# Altium PCB PCB1.PcbDoc
Units mm, origin at the board's own origin, x right, y up, seen from the top; angles counter-clockwise.
Board outline 80.35 x 60.25 mm, 2 copper layers (Top Layer, Bottom Layer); 48 components, 37 nets, 170 pads, 23 vias.
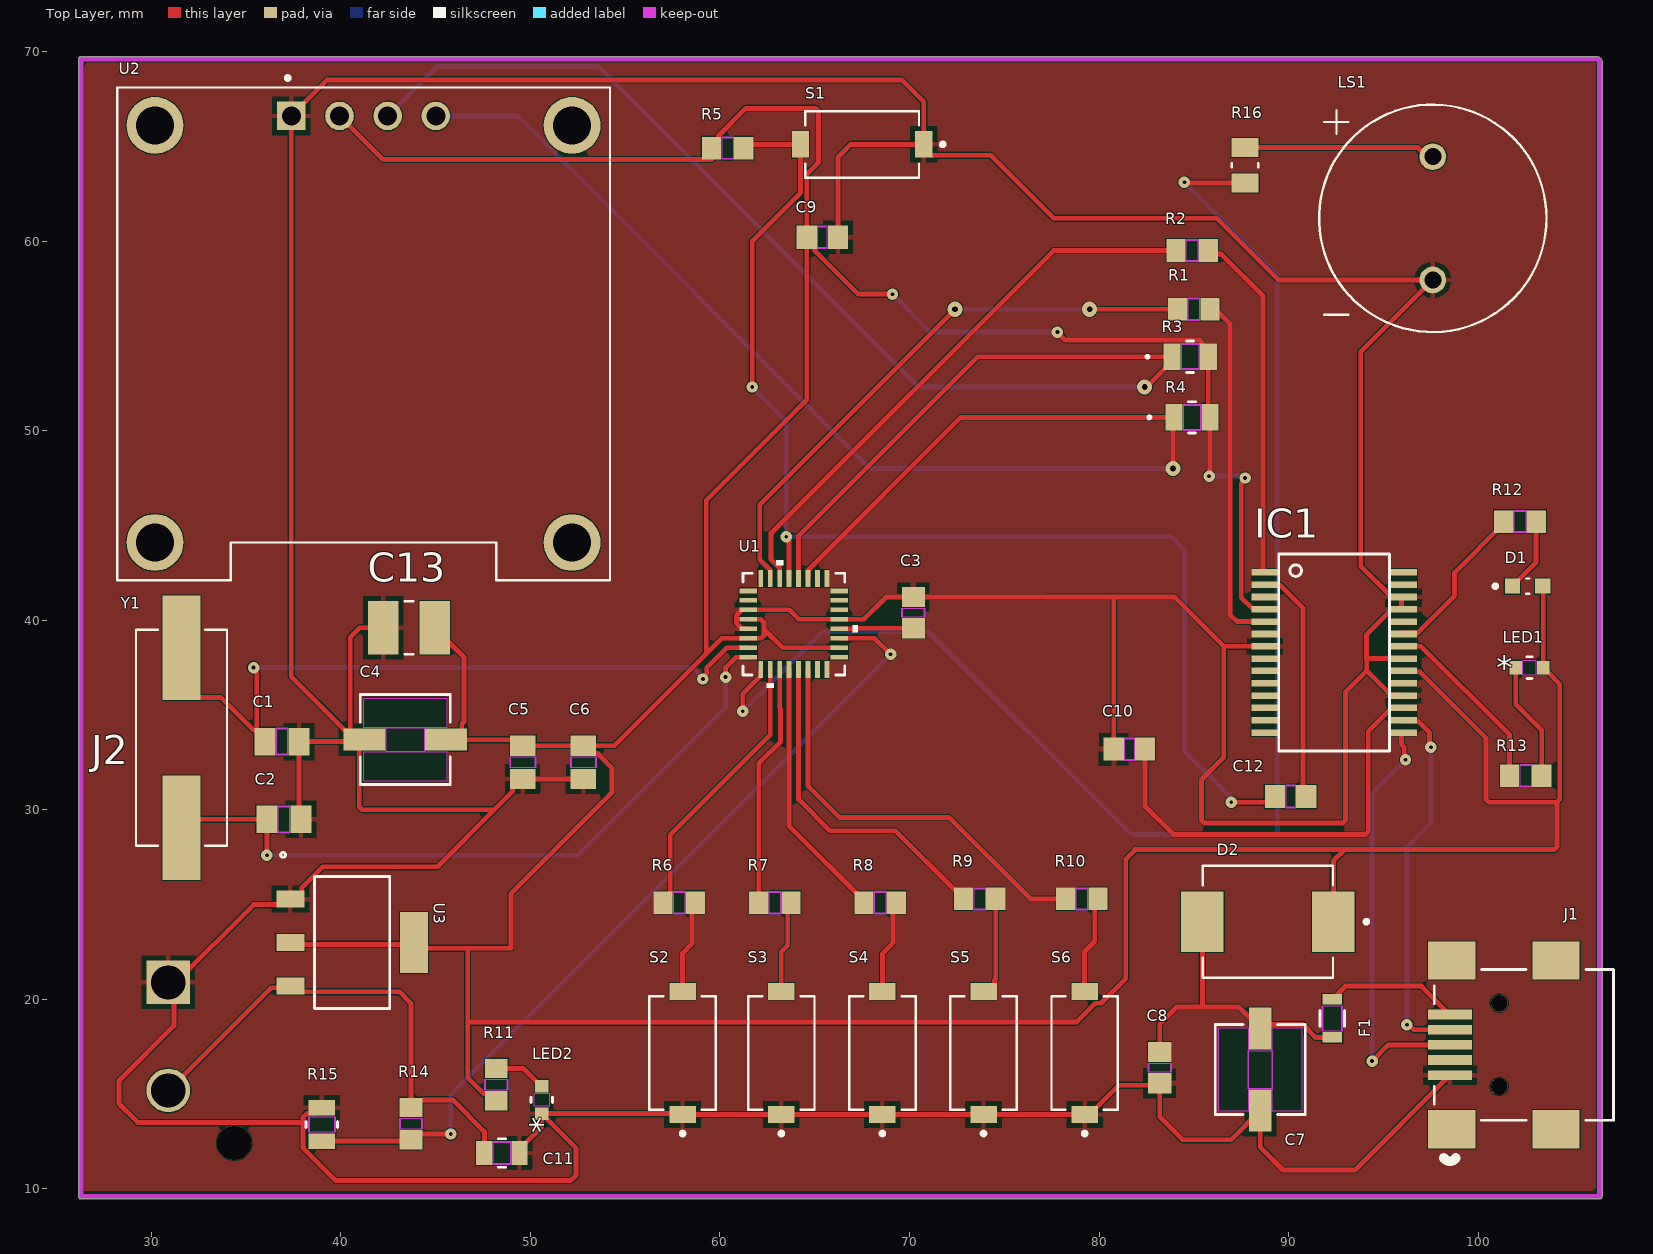
[diagram p0: Top Layer view]
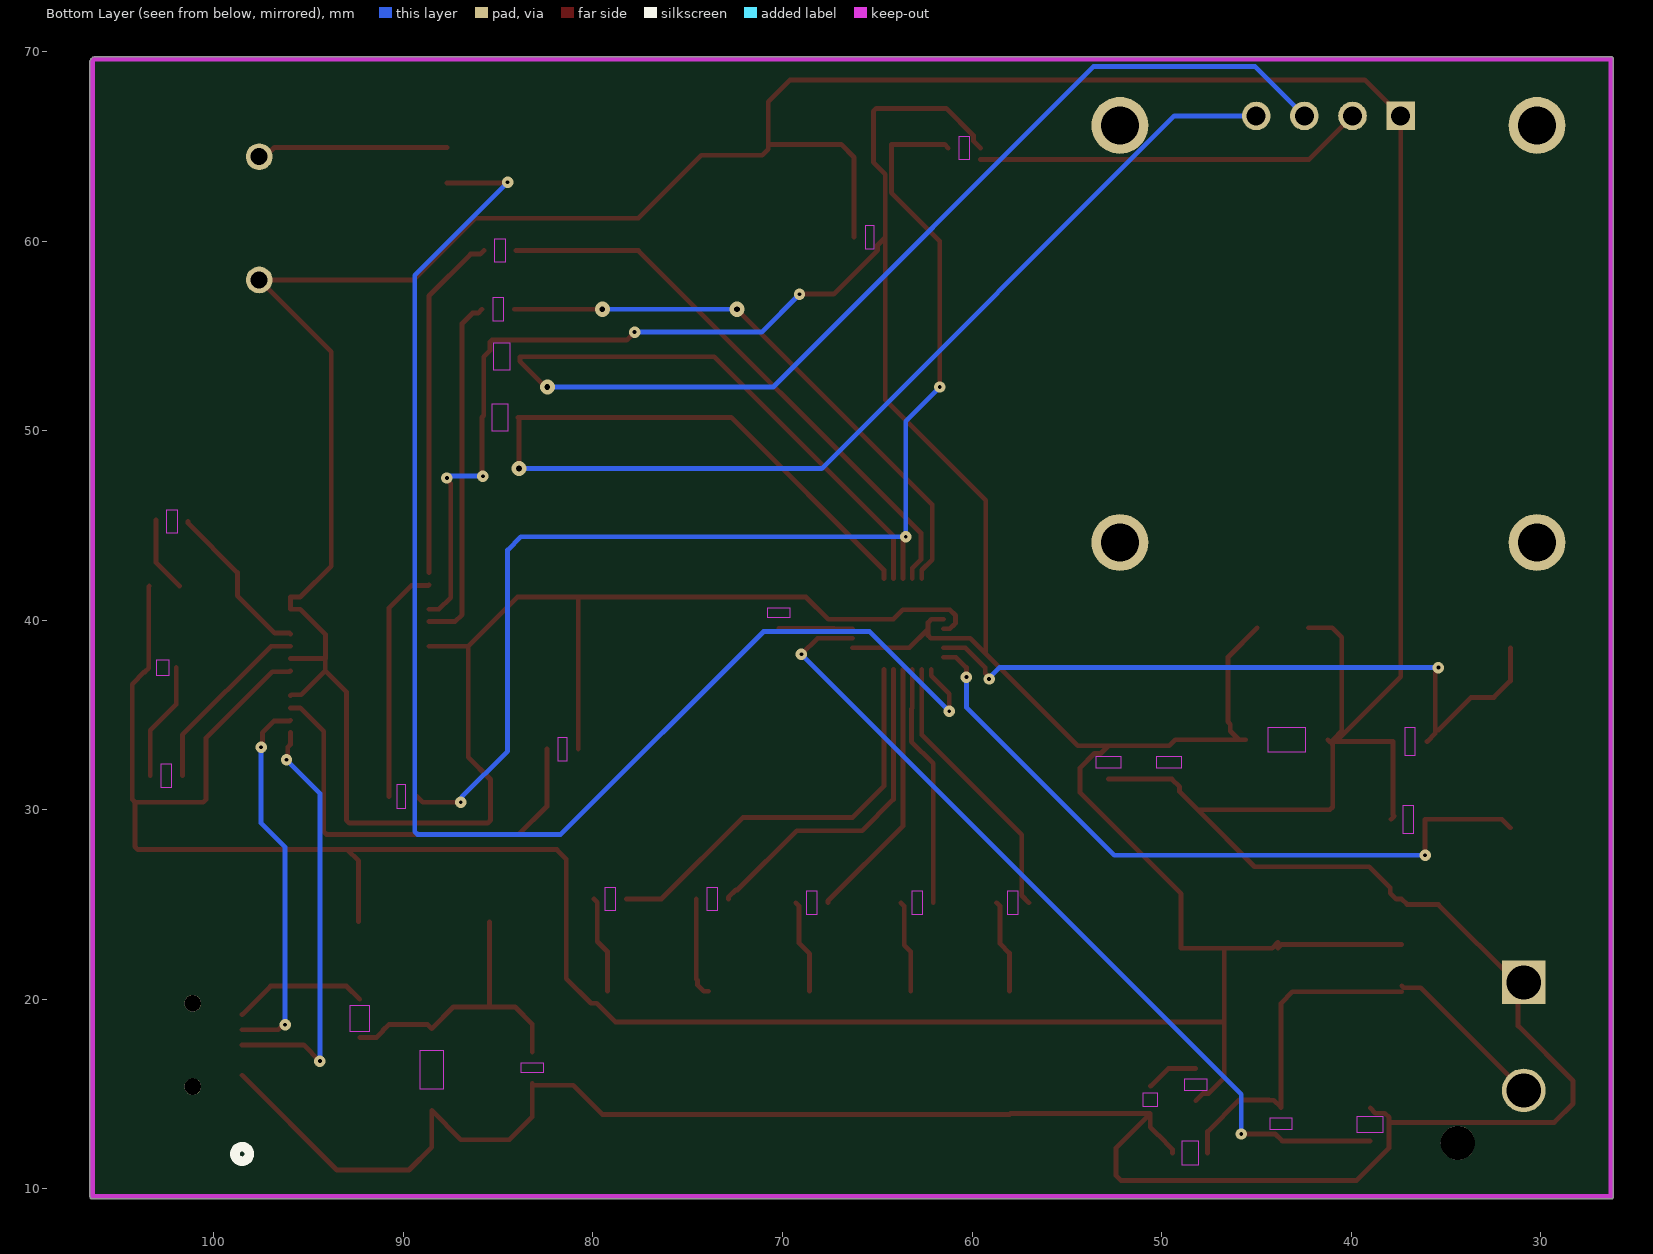
[diagram p1: Bottom Layer view, seen from below]
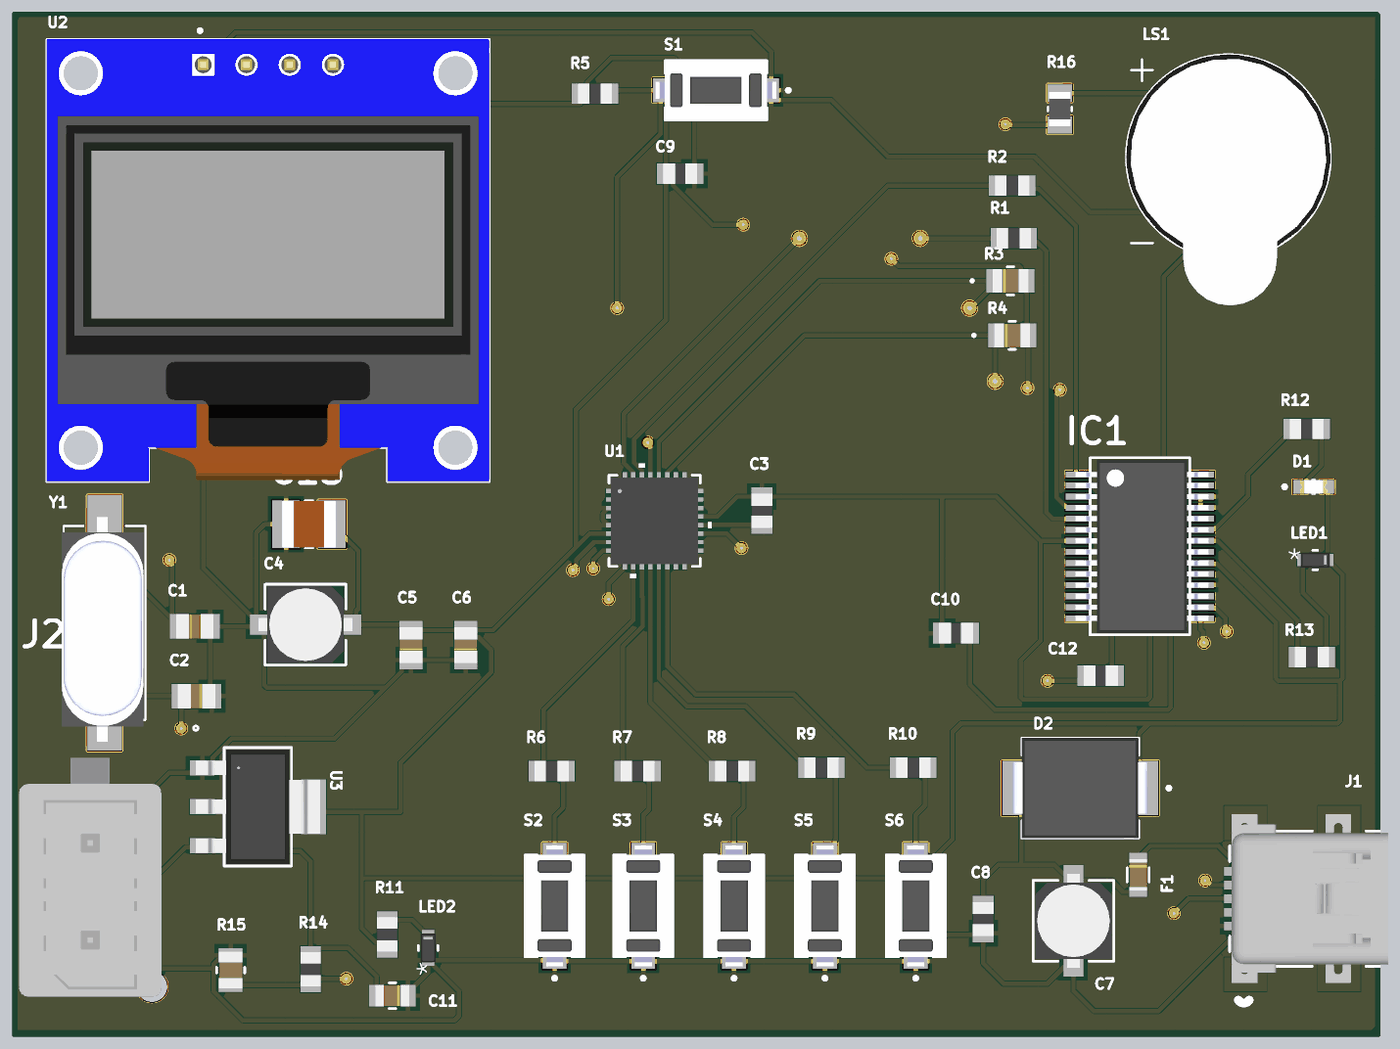
[diagram p2: 3D render of the assembled board from above, using the file's embedded part models]

## Layer stack, top to bottom
Top Solder: solder mask 0.0102, Solder Resist, Dk 3.5
Top Layer: signal copper 0.0356
Dielectric 1: dielectric 0.32, FR-4, Dk 4.8
Bottom Layer: signal copper 0.0356
Bottom Solder: solder mask 0.0102, Solder Resist, Dk 3.5

## Board outline
26.173,9.6 ccw(c26.3,9.6) 26.3,9.473 106.4,9.473 ccw(c106.4,9.6) 106.527,9.6 106.527,69.5 106.49,69.59 106.39,69.69 106.3,69.727 26.3,69.727 ccw(c26.3,69.6) 26.173,69.6

## Design rules (kind name [scope] priority, off if disabled: settings)
Clearance [All] p1: gap=0.05 ignorepadtopadclearanceinfootprint=FALSE
PolygonConnect [All] p1: connectstyle=Relief reliefconductorwidth=0.254 reliefentries=4 polygonreliefangle="90 Angle" airgapwidth=0.254
RoutingVias [All] p1: holewidth=0.711 width=1.27 viastyle="Through Hole" minholewidth=0.711 minwidth=1.27 maxholewidth=0.711 maxwidth=1.27
SolderMaskExpansion [All] p1: expansion=0.102 istentingtop=FALSE
Width [All] p1: maxlimit=0.254 minlimit=0.254 preferedwidth=0.254
30 further rules are at their usual default settings.

## Components (designator, comment, footprint, x,y, rotation, side; value= is the part's Value field where it differs from the comment)
C1 "CAP_18pfar_805pkg" CAP_CC0805_YAG 36.897,33.6 r0 top
C2 "CAP_18pfar_805pkg" CAP_CC0805_YAG 37,29.5 r180 top
C3 "100nF" CC0805N_YAG 70.2,40.4 r270 top
C4 "4.7uF" CAP_PAN_EEE_B_PAN 43.4,33.7 r180 top
C5 "1uF" CAP_CL21B105KAFNNNE_SAM 49.6,32.5 r90 top
C6 "1uF" CAP_CL21B105KAFNNNE_SAM 52.8,32.5 r90 top
C7 "3.7uF" CAP_PAN_EEE_B_PAN 88.5,16.3 r270 top
C8 "100nF" CC0805N_YAG 83.2,16.4 r90 top
C9 "100nF" CC0805N_YAG 65.4,60.2 r180 top
C10 "100nF" CC0805N_YAG 81.6,33.2 r0 top
C11 "10uF" CAP_CL21_SAM 48.5,11.9 r180 top
C12 "100nF" CC0805N_YAG 90.1,30.7 r0 top
C13 "22uF" CAPC3225X280N 43.6,39.6 r0 top
D1 "Red" LED_150060RS75000 102.6,41.8 r0 top
D2 "SS34" DIOM7959X265N 88.9,24.1 r180 top
F1 "MF-FSMF050X-2" FUSE_MF-FSMF050X_BRN 92.3,19 r270 top
IC1 "FT232RL-TUBE" SSOP28-LD 92.4,38.3 r270 top
J1 "1734327-2" CONN_1734327-2_TEC 102.4,17.6 r90 top
J2 "768290102" MOLEX_768290102 30.9,20.9 r180 top
LED1 "Green" LED_150060GS75000_WRE 102.7,37.5 r0 top
LED2 "Green" LED_150060GS75000_WRE 50.6,14.7 r90 top
LS1 "AT-1224-TWT-5V-2-R" XDCR_AT-1224-TWT-5V-2-R 97.6,61.2 r0 top
R1 "1K" RC0805N_YAG 85,56.4 r180 top
R2 "1K" RC0805N_YAG 84.9,59.5 r180 top
R3 "4.7K" RES_CRCW_0805_VIS 84.8,53.9 r0 top
R4 "4.7K" RES_CRCW_0805_VIS 84.9,50.7 r0 top
R5 "1K" RC0805N_YAG 60.4,64.9 r0 top
R6 "1K" RC0805N_YAG 57.851,25.1 r0 top
R7 "1K" RC0805N_YAG 62.9,25.1 r0 top
R8 "1K" RC0805N_YAG 68.451,25.1 r0 top
R9 "1K" RC0805N_YAG 73.7,25.3 r0 top
R10 "1K" RC0805N_YAG 79.092,25.3 r0 top
R11 "1K" RC0805N_YAG 48.2,15.5 r270 top
R12 "1K" RC0805N_YAG 102.2,45.2 r180 top
R13 "1K" RC0805N_YAG 102.5,31.8 r180 top
R14 "1K" RC0805N_YAG 43.7,13.449 r270 top
R15 "3K" RES_CRG0805_TEC 39,13.4 r270 top
R16 "220" RESC2012X65N 87.7,64 r270 top
S1 "PTS636_SM43J_SMTR_LFS" SW_PTS636_SM43J_SMTR_LFS 67.5,65.1 r180 top
S2 "PTS636_SM43J_SMTR_LFS" SW_PTS636_SM43J_SMTR_LFS 58.028,17.175 r90 top
S3 "PTS636_SM43J_SMTR_LFS" SW_PTS636_SM43J_SMTR_LFS 63.235,17.175 r90 top
S4 "PTS636_SM43J_SMTR_LFS" SW_PTS636_SM43J_SMTR_LFS 68.569,17.175 r90 top
S5 "PTS636_SM43J_SMTR_LFS" SW_PTS636_SM43J_SMTR_LFS 73.903,17.175 r90 top
S6 "PTS636_SM43J_SMTR_LFS" SW_PTS636_SM43J_SMTR_LFS 79.237,17.175 r90 top
U1 "ATMEGA328P-MUR" 32M1-A_ATM 63.9,39.8 r0 top
U2 "DM-OLED096-636" MODULE_DM-OLED096-636 41.2,55.1 r0 top
U3 "AMS1117-5.0" SOT_AMS1117-2.5_AMS 40.6,23 r270 top
Y1 "ECS-160-20-5PX-TR" XTAL_ECS-160-20-5PX-TR 31.6,33.8 r90 top

## Footprints (in the part's own frame and the unit in brackets; to place one, negate y for a bottom-side part, rotate by r counter-clockwise, add the part's x,y. Pads: shape width x height; smd on the part's side, far side on the other; paste and mask are expansions set on the pad)
32M1-A_ATM [mil]
  rect 36x10 smd paste+0 mask+0: 1(-94.5,68.9) 2(-94.5,49.21) 3(-94.5,29.53) 4(-94.5,9.84) 5(-94.5,-9.84) 6(-94.5,-29.53) 7(-94.5,-49.21) 8(-94.5,-68.9) 17(94.5,-68.9) 18(94.5,-49.21) 19(94.5,-29.53) 20(94.5,-9.84) 21(94.5,9.84) 22(94.5,29.53) 23(94.5,49.21) 24(94.5,68.9)
  rect 10x36 smd paste+0 mask+0: 9(-68.9,-94.5) 10(-49.21,-94.5) 11(-29.53,-94.5) 12(-9.84,-94.5) 13(9.84,-94.5) 14(29.53,-94.5) 15(49.21,-94.5) 16(68.9,-94.5) 25(68.9,94.5) 26(49.21,94.5) 27(29.53,94.5) 28(9.84,94.5) 29(-9.84,94.5) 30(-29.53,94.5) 31(-49.21,94.5) 32(-68.9,94.5)
  silkscreen extent -106,-132 132,132, body extent -101,-101 101,101, height 65
CAP_CC0805_YAG [mil]
  rect 44x57 smd paste+0 mask+0: 1(-35.31,0) 2(35.31,0)
  Top Layer keep-out region: -11.31,-26.5 -11.31,26.5 11.31,26.5 11.31,-26.5
  Keep-Out Layer region: -11.31,-28.5 -11.31,28.5 11.31,28.5 11.31,-28.5
  body extent -43,-29 43,29, height 57
CAP_CL21_SAM [mm]
  rect 0.856x1.25 smd paste+0 mask+0: 1(-0.928,0) 2(0.928,0)
  Top Layer keep-out region: -0.449,-0.574 -0.449,0.574 0.449,0.574 0.449,-0.574
  Keep-Out Layer region: -0.449,-0.625 -0.449,0.625 0.449,0.625 0.449,-0.625
  silkscreen extent -0.19,-0.75 0.19,0.75, body extent -1,-0.63 1,0.63, height 1.35
CAP_CL21B105KAFNNNE_SAM [mil]
  rect 42x53 smd paste+0 mask+0: 1(-34.5,0) 2(34.5,0)
  Top Layer keep-out region: -11.5,-24.5 -11.5,24.5 11.5,24.5 11.5,-24.5
  Keep-Out Layer region: -11.5,-26.5 -11.5,26.5 11.5,26.5 11.5,-26.5
  body extent -41,-26 41,26, height 53
CAP_PAN_EEE_B_PAN [mil]
  rect 87x46 smd paste+0 mask+0: 1(-85,0) 2(85,0)
  Top Layer keep-out region: -39.5,-25 -39.5,25 39.5,25 39.5,-25
  Top Layer keep-out region: -86.5,25 -86.5,86.5 86.5,86.5 86.5,25
  Top Layer keep-out region: -86.5,-86.5 -86.5,-25 86.5,-25 86.5,-86.5
  Keep-Out Layer region: -39.5,-25 -39.5,25 39.5,25 39.5,-25
  silkscreen extent -94,-94 94,94, body extent -109,-89 109,89, height 242
CAPC3225X280N [mm]
  rect 1.6x2.81 smd: 1(-1.353,0) 2(1.353,0)
  silkscreen extent -0.23,-1.4 0.23,1.4, body extent -1.6,-1.4 1.6,1.4, height 2.47
CC0805N_YAG [mil]
  rect 42x48 smd paste+0 mask+0: 1(-32.5,0) 2(32.5,0)
  Top Layer keep-out region: -9.5,-22 -9.5,22 9.5,22 9.5,-22
  Keep-Out Layer region: -9.5,-24 -9.5,24 9.5,24 9.5,-24
  body extent -39,-24 39,24, height 28
CONN_1734327-2_TEC [mil]
  rect 20x91 smd paste+0 mask+0: 1(-62.99,153.44) 2(-31.5,153.44) 3(0,153.44) 4(31.5,153.44) 5(62.99,153.44)
  rect 79x98 smd paste-49 mask-49: 6(-175.2,149.5) 7(175.2,149.5) 8(-175.2,-67.03) 9(175.2,-67.03)
  round 35 / inner round 60 / far side round 35 hole 35 unplated paste-99999 mask-17.5: 10(-86.61,51.08) 11(86.61,51.08)
  silkscreen extent -241,-186 156,186, body extent -195,-181 195,181, height 162
DIOM7959X265N [mm]
  rect 2.25x3.18 smd: A(3.455,0) C(-3.455,0)
  silkscreen extent -5.3,-2.95 3.44,2.95, body extent -3.98,-2.95 3.98,2.95, height 2.65
FUSE_MF-FSMF050X_BRN [mil]
  rect 22x41 smd paste+0 mask+0: 1(-39.5,0) 2(39.5,0)
  Top Layer keep-out region: -26.5,-18.5 -26.5,18.5 26.5,18.5 26.5,-18.5
  Keep-Out Layer region: -26.5,-20.5 -26.5,20.5 26.5,20.5 26.5,-20.5
  silkscreen extent -16,-26 16,26, body extent -36,-21 36,21, height 39
LED_150060GS75000_WRE [mil]
  rect 26x28 smd paste+0 mask+0: 1(-28.5,0) 2(28.5,0)
  Top Layer keep-out region: -13.5,-15.5 -13.5,15.5 13.5,15.5 13.5,-15.5
  Keep-Out Layer region: -13.5,-15.5 -13.5,15.5 13.5,15.5 13.5,-15.5
  silkscreen extent -6,-22 6,22, body extent -34,-17 34,17, height 32
LED_150060RS75000 [mm]
  rect 0.8x0.8 smd: 1(-0.8,0) 2(0.8,0)
  silkscreen extent -1.8,-0.4 0.08,0.4, body extent -0.8,-0.4 0.8,0.4, height 0.7
MODULE_DM-OLED096-636 [mm]
  rect 1.508x1.508 / inner round 1.508 / far side rect 1.508x1.508 hole 1: 1(-3.81,11.5)
  round 1.508 hole 1: 2(-1.27,11.5) 3(1.27,11.5) 4(3.81,11.5)
  round 3 hole 2: S1(-11,11) S2(11,11) S3(11,-11) S4(-11,-11)
  silkscreen extent -13,-13 13,13.6, body extent -13,-13 13,13, height 5.66
MOLEX_768290102 [mm]
  rect 2.3x2.3 / inner round 2.3 / far side rect 2.3x2.3 hole 1.8 mask+0.076: 1(0,0)
  round 2.3 hole 1.8 mask+0.076: 2(0,5.7)
  round 1.8 hole 1.8 unplated mask+0.076: ""(-3.48,8.47)
  body extent -4.03,-4.99 4.32,9.05, height 14.81
RC0805N_YAG [mil]
  rect 40x47 smd paste+0 mask+0: 1(-33.5,0) 2(33.5,0)
  Top Layer keep-out region: -11.5,-21.5 -11.5,21.5 11.5,21.5 11.5,-21.5
  Keep-Out Layer region: -11.5,-23.5 -11.5,23.5 11.5,23.5 11.5,-23.5
  body extent -39,-24 39,24, height 28
RES_CRCW_0805_VIS [mil]
  rect 36x55 smd paste+0 mask+0: 1(-37.5,0) 2(37.5,0)
  Top Layer keep-out region: -17.5,-25.5 -17.5,25.5 17.5,25.5 17.5,-25.5
  Keep-Out Layer region: -17.5,-27.5 -17.5,27.5 17.5,27.5 17.5,-27.5
  silkscreen extent -91,-32 7,32, body extent -41,-27 41,27, height 24
RES_CRG0805_TEC [mil]
  rect 32x55 smd paste+0 mask+0: 1(-34.5,0) 2(34.5,0)
  Top Layer keep-out region: -16.5,-25.5 -16.5,25.5 16.5,25.5 16.5,-25.5
  Keep-Out Layer region: -16.5,-27.5 -16.5,27.5 16.5,27.5 16.5,-27.5
  silkscreen extent -6,-32 6,32, body extent -43,-27 43,27, height 26
RESC2012X65N [mm]
  rect 1x1.42 smd: 1(-0.935,0) 2(0.935,0)
  silkscreen extent -0.12,-0.7 0.12,0.7, body extent -1,-0.63 1,0.63, height 0.66
SOT_AMS1117-2.5_AMS [mil]
  rect 35x58 smd paste+0 mask+0: 1(-90.16,-128.5) 2(0,-128.5) 3(90.16,-128.5)
  rect 126x58 smd paste+0 mask+0: 4(0,128.5)
  silkscreen extent -187,-148 137,78, body extent -132,-144 132,144, height 71
SSOP28-LD [mm]
  rect 0.348x1.397 smd: 1(-4.225,-3.656) 2(-3.575,-3.656) 3(-2.925,-3.656) 4(-2.275,-3.656) 5(-1.625,-3.656) 6(-0.975,-3.656) 7(-0.325,-3.656) 8(0.325,-3.656) 9(0.975,-3.656) 10(1.625,-3.656) 11(2.275,-3.656) 12(2.925,-3.656) 13(3.575,-3.656) 14(4.225,-3.656) 15(4.225,3.656) 16(3.575,3.656) 17(2.925,3.656) 18(2.275,3.656) 19(1.625,3.656) 20(0.975,3.656) 21(0.325,3.656) 22(-0.325,3.656) 23(-0.975,3.656) 24(-1.625,3.656) 25(-2.275,3.656) 26(-2.925,3.656) 27(-3.575,3.656) 28(-4.225,3.656)
  silkscreen extent -5.2,-2.93 5.2,2.93, body extent -5.1,-3.77 5.1,4.03, height 2
SW_PTS636_SM43J_SMTR_LFS [mm]
  rect 0.9x1.4 smd: 1(-3.25,0) 2(3.25,0)
  silkscreen extent -4.35,-1.75 3,1.75, body extent -3.55,-1.75 3.55,1.75, height 4.31
XDCR_AT-1224-TWT-5V-2-R [mm]
  round 1.408 hole 0.9: N(0,-3.25) P(0,3.25)
  silkscreen extent -6,-6 6,6, body extent -6,-8.73 6,6.01, height 9.06
XTAL_ECS-160-20-5PX-TR [mm]
  rect 5.5x2 smd: 1(-4.75,0) 2(4.75,0)
  silkscreen extent -5.7,-2.4 5.7,2.4, body extent -6.98,-2.28 6.22,2.52, height 4.31

## Part data
C1 C2: "No Description Available", Mfr_Name=Yageo
C3 C8 C9 C10 C12: library part CC0805KRX7R9BB104, "No Description Available", Mfr_Name=Yageo
C4 C7: library part EEE-HA1E4R7R, "No Description Available", Mfr_Name=Panasonic
C5 C6: library part CL21B105KAFNNNE, "No Description Available", Mfr_Name=Samsung
C11: library part CAP_10ufar_805pkg, "No Description Available", Mfr_Name=Samsung
C13: library part GCJ32ER71C226KE01L, "SMD Capacitor X7R_EIA_ with Capacitance: 22uF Tol. 10%. Rated Voltage: 16Vdc", Package="3225 Murata", Availability=Unavailable, MF=Murata, MP=GCJ32ER71C226KE01L, Price=None, SnapEDA_Link=https://www.snapeda.com/parts/GCJ32ER71C226KE01L/Murata/view-part/4383175/?ref=snap
D1: library part 150060RS75000, Package=None, Availability=Unavailable, MP=150060RS75000, Price=None
D2: "Diode Schottky 40 V 3A Surface Mount SMC (DO-214AB)", Package="SMC-2 ON Semiconductor", Check_prices=https://www.snapeda.com/parts/SS34/Onsemi/view-part/?ref=eda, MF=onsemi, MP=SS34, SnapEDA_Link=https://www.snapeda.com/parts/SS34/Onsemi/view-part/?ref=snap
F1: "No Description Available", Mfr_Name="Bourns Electronics"
IC1: "USB Bridge, USB to UART USB 2.0 UART Interface 28-SSOP", Package="SSOP-28 FTDI", Check_prices=https://www.snapeda.com/parts/FT232RL-TUBE/FTDI%252C+Future+Technology+Devices+International+Ltd/view-part/?ref=eda, Digi-Key_Part_Number=768-1306-ND, MF=FTDI,, MP=FT232RL-TUBE, Purchase-URL=https://pricing.snapeda.com/search/part/FT232RL-TUBE/?ref=eda, SnapEDA_Link=https://www.snapeda.com/parts/FT232RL-TUBE/FTDI%252C+Future+Technology+Devices+International+Ltd/view-part/?ref=snap
J1: "No Description Available", Mfr_Name="TE Connectivity", RefDes=RefDes, Type="USB, DVI, HDMI, Connectors"
J2: Package=None, Availability=Unavailable, MP=768290102, Price=None
LED1 LED2: library part 150060GS75000, "No Description Available", Mfr_Name="Wurth Electronics"
LS1: "AUDIO TRANSDUCER 12 VP-P 85 DB 2400 HZ", Package=None, Availability=Unavailable, MP=AT-1224-TWT-5V-2-R, Price=None
R1 R2 R5 R6 R7 R8 R9 R10 R11 R12 R13 R14: library part RC0805FR-071KL, "No Description Available", Mfr_Name=Yageo
R3 R4: library part CRCW08054K70FKEAC, "No Description Available", Mfr_Name=Vishay
R15: library part CRG0805F3K0, "No Description Available", Mfr_Name="TE Connectivity"
R16: library part CRGCQ0805F220R, "Fixed Resistor CRGCQ 0805 220R 1%", Package="2012 TE Connectivity", Digi-Key_Part_Number=A129741CT-ND, DigiKey-Purchase-URL=https://snapeda.com/shop?store=DigiKey&id=3188284, MF="TE Connectivity", Mouser-Purchase-URL=https://snapeda.com/shop?store=Mouser&id=3188284, MP=CRGCQ0805F220R, SnapEDA_Link=https://www.snapeda.com/parts/CRGCQ0805F220R/TE%20Connectivity%20Passive%20Product/view-part/3188284/?ref=snap
S1 S2 S3 S4 S5 S6: "Tactile Switch SPST-NO Top Actuated Surface Mount", Package=None, Availability=Unavailable, MP=PTS636_SM43J_SMTR_LFS, Price=None
U1: "No Description Available", Mfr_Name=Microchip, RefDes=RefDes, Type=Type
U2: "0.96â€ 128 X 64 MONOCHROME GRAPHIC OLED DISPLAY MODULE - I2C", Package=Package, Check_prices=https://www.snapeda.com/parts/DM-OLED096-636/Display+Module/view-part/?ref=eda, MF="Display Module", MP=DM-OLED096-636, SnapEDA_Link=https://www.snapeda.com/parts/DM-OLED096-636/Display+Module/view-part/?ref=snap
U3: "No Description Available", Mfr_Name="ams OSRAM", RefDes=RefDes, Type=Type
Y1: "16MHz Â±30ppm Crystal 20pF 40 Ohms HC-49/US", Package="HC49/US ECS International", Availability=Unavailable, MF="ECS Inc.", MP=ECS-160-20-5PX-TR, Price=None, SnapEDA_Link=https://www.snapeda.com/parts/ECS-160-20-5PX-TR/ECS%20Inc./view-part/554223/?ref=snap

## Via types
v1: diameter 0.6, hole 0.2, Top Layer to Bottom Layer, 19 vias
v2: diameter 0.8, hole 0.3, Top Layer to Bottom Layer, 4 vias

## Nets (pads, with @x,y where several pads share a name; then routed paths per layer and width w, separated by ;. In a path a pad name is that pad's centre, name@x,y a point inside that pad or via, vN(x,y) a via of type N, cw(c..) or ccw(c..) an arc to the next point about the centre after c; other vN are vias at no path point)
3.3: C10.2 IC1.17 | length 23
  Top Layer w0.254: C10.2 82.425,30.175 83.9,28.7 94.051,28.7 94.2,28.849 94.2,34.143 95.432,35.375 IC1.17@95.956,35.375
+5: C4.1 C5.2 C6.2 C9.2 C13.2 D1.2 D2.C IC1.4 IC1.20 LED1.2 R3.2 R4.2 R5.1 R11.2 U1.4 U1.6 U1.18 U2.2 U3.2 U3.4 | length 261.3
  Top Layer w0.254: U3.2@37.336,22.9 43.664,22.9 U3.4@43.864,22.7 ; U2.2 42.23,64.3 59.549,64.3 ; U3.4 44.164,22.7 46.7,22.7 ; C13.2 46.5,38.053 46.5,34.641 46.375,34.516 46.375,34.157 C4.1@45.918,33.7 ; C4.1 C4.1@45.918,33.7 ; R11.2 47.819,15.03 47.531,15.03 46.7,15.861 46.7,18.8 ; R5.1 59.93,65.281 59.93,65.569 61.361,67 65.051,67 65.2,66.851 65.2,64.154 64.575,63.529 C9.2 ; U1.4 62.146,40.05 62.32,39.876 62.32,39.537 ; U1.18 63.307,38.55 62.32,39.537 ; v1(69.1,57.2) 67.299,57.2 64.981,59.518 64.981,59.794 C9.2 ; v1(77.8,55.2) 78.224,54.775 85.318,54.775 85.422,54.671 85.422,54.23 R3.2 85.753,50.8 R4.2 85.853,47.652 v1(85.8,47.6) ; v1(87.7,47.5) 87.7,47.406 87.5,47.206 87.5,41.194 88.12,40.575 IC1.4@88.644,40.575 ; D2.C 92.355,27.305 92.95,27.9 ; IC1.20@95.956,37.325 95.998,37.283 96.917,37.283 100.4,33.8 100.4,30.549 100.549,30.4 104.151,30.4 ; D1.2 103.424,41.776 LED1.2 103.424,37.475 103.627,37.271 103.653,37.271 104.3,36.624 104.3,30.549 104.151,30.4 ; C4.1@45.918,33.7 49.276,33.7 C5.2 C6.2 ; 46.7,18.8 78.8,18.8 79.798,19.798 80.098,19.798 81.4,21.1 81.4,27.4 81.9,27.9 92.95,27.9 ; 46.7,18.8 46.7,22.7 ; 46.7,22.7 48.975,22.7 48.975,25.575 54.3,30.9 54.3,32.216 53.546,32.97 53.206,32.97 C6.2 ; C6.2 54.421,33.376 59.272,38.228 ; 59.272,38.228 60.095,39.05 U1.6 62.171,39.05 62.32,39.199 62.32,39.537 ; 59.272,38.228 59.272,46.321 64.575,51.624 C9.2 ; 92.95,27.9 104,27.9 104.151,28.051 104.151,30.4
  Bottom Layer w0.254: v1(69.1,57.2) 71.1,55.2 v1(77.8,55.2) ; v1(85.8,47.6) 87.6,47.6 v1(87.7,47.5)
AREF: C3.2 U1.20 | length 3.9
  Top Layer w0.254: U1.20 67.251,39.55 67.276,39.575 C3.2
BTN1: R6.1 U1.10 | length 14.6
  Top Layer w0.254: R6.1 57.381,25.481 57.381,28.685 62.65,33.954 U1.10
BTN2: R7.1 U1.11 | length 12.8
  Top Layer w0.254: R7.1 62.049,32.449 63.2,33.6 63.2,35.31 63.15,35.36 U1.11
BTN3: R8.1 U1.12 | length 13.9
  Top Layer w0.254: U1.12 63.65,29.139 67.6,25.189 R8.1
BTN4: R9.1 U1.13 | length 17.8
  Top Layer w0.254: U1.13 64.15,30.55 65.8,28.9 69.249,28.9 72.379,25.77 72.468,25.77 72.849,25.389 R9.1
BTN5: R10.1 U1.14 | length 22.2
  Top Layer w0.254: U1.14 64.65,31.25 66.3,29.6 72.08,29.6 76.38,25.3 R10.1
Buzzer: R16.2 U1.9 | length 76.5
  Top Layer w0.254: v1(61.2,35.2) 61.2,36.119 62.15,37.069 U1.9 ; v1(84.5,63.1) 84.535,63.065 R16.2
  Bottom Layer w0.254: v1(61.2,35.2) 65.4,39.4 71,39.4 81.7,28.7 89.251,28.7 89.4,28.849 89.4,58.2 v1(84.5,63.1)
DVBAT: R14.2 R15.2 U1.19 | length 44.9
  Top Layer w0.254: R15.2 43.626,12.524 R14.2 44.002,12.9 v1(45.8,12.9) ; U1.19 68.15,39.05 v1(69,38.2)
  Bottom Layer w0.254: v1(45.8,12.9) 45.8,15 v1(69,38.2)
GND: C1.2 C2.1 C3.1 C4.2 C5.1 C6.1 C7.2 C8.1 C9.1 C10.1 C11.1 C13.1 IC1.7 IC1.18 IC1.21 IC1.25 IC1.26 J1.1 J2.1 LED2.1 LS1.N R15.1 S1.1 S2.1 S3.1 S4.1 S5.1 S6.1 U1.3 U1.5 U1.21 U2.1 U3.1 | length 354.1
  Top Layer w0.254: C2.1 37.725,29.671 37.794,29.739 C1.2 C4.2@41.026,33.6 ; R15.1 38.721,13.997 38.281,13.997 38.228,13.996 38.005,13.773 38.005,13.5 ; C4.2 41.141,33.6 C4.2@41.026,33.6 ; C13.1 41,39.6 40.5,39.1 40.5,34.157 40.957,33.7 40.72,33.7 37.39,37.03 U2.1 39.29,68.5 69.6,68.5 70.75,67.35 S1.1 ; C11.1 49.428,12.097 50.162,12.831 50.167,12.831 50.6,13.265 LED2.1 ; C6.1 C5.1 49.46,31.624 49.054,31.217 49.054,30.954 48.1,30 ; U1.5 61.169,39.55 60.99,39.73 60.986,39.73 60.865,39.85 60.865,40.25 61.165,40.55 U1.3 63.65,40.55 64.15,40.05 U1.21 67.586,40.05 68.762,41.226 C3.1 77.166,41.226 ; C9.1 66.226,64.426 66.9,65.1 S1.1 ; 77.192,41.226 80.774,41.226 ; C10.1 80.774,41.226 ; C8.1@83.2,15.475 81.036,15.475 79.487,13.925 S6.1 S5.1 S4.1 S3.1 S2.1 57.977,13.976 LED2.1 ; C8.1 83.2,13.8 84.4,12.6 86.959,12.6 C7.2 88.5,12.2 89.7,11 93.503,11 J1.1 ; 83.975,41.226 80.774,41.226 ; 83.992,41.208 86.575,38.625 ; IC1.7@88.644,38.625 86.575,38.625 ; IC1.18@95.956,36.025 95.909,36.072 95.385,36.072 94.12,37.336 ; IC1.21@95.956,37.975 94.12,37.975 ; 38.005,13.5 38.005,12.163 39.719,10.45 52.15,10.45 52.4,10.7 52.4,12.176 LED2.1 ; 38.005,13.5 34.503,13.5 ccw(c34.38,12.43) 34.257,13.5 29.3,13.5 29.226,13.574 28.3,14.5 28.3,15.7 31.2,18.6 31.2,20.8 35.4,25 36.4,25 36.407,25.007 37.053,25.007 U3.1 37.625,25.29 37.942,25.608 37.942,25.896 39.046,27 45.1,27 48.1,30 ; C4.2@41.026,33.6 41.026,33.485 40.976,33.435 40.976,30.149 41.125,30 48.1,30 ; S1.1 70.75,64.85 71.073,64.527 74.273,64.527 77.6,61.2 86.2,61.2 89.45,57.95 LS1.N 93.805,54.155 93.805,42.851 95.432,41.225 95.956,41.225 95.956,40.575 95.432,40.575 94.1,39.243 94.1,37.975 94.12,37.975 ; 86.575,38.625 86.575,32.775 85.4,31.6 85.4,29.449 85.549,29.3 92.851,29.3 93,29.449 93,36.216 94.12,37.336 ; 94.12,37.336 94.12,37.975
NetC12_2: C12.2 IC1.2 | length 12.6
  Top Layer w0.254: IC1.2@88.644,41.875 88.691,41.828 89.572,41.828 90.751,40.649 C12.2@90.751,30.7
NetD1_1: D1.1 R12.1 | length 4
  Top Layer w0.254: D1.1 103.051,43.051 R12.1 R12.1@103.051,45.289
NetF1_1: F1.1 J1.5 | length 7.1
  Top Layer w0.254: F1.1 92.997,20.7 97.003,20.7 J1.5
NetIC1_15: IC1.15 J1.3 | length 22.6
  Top Layer w0.254: v1(94.4,16.745) 95.255,17.6 J1.3 ; IC1.15@95.956,34.075 95.956,33.445 96.097,33.305 96.097,32.703 v1(96.163,32.637)
  Bottom Layer w0.254: v1(94.4,16.745) 94.4,30.875 v1(96.163,32.637)
NetIC1_16: IC1.16 J1.4 | length 20.1
  Top Layer w0.254: IC1.16@95.956,34.725 96.003,34.678 96.822,34.678 97.434,34.066 97.434,33.366 v1(97.5,33.3) ; v1(96.234,18.666) 96.327,18.666 96.594,18.4 J1.4
  Bottom Layer w0.254: v1(96.234,18.666) 96.234,28.034 97.5,29.3 v1(97.5,33.3)
NetIC1_22: IC1.22 R13.2 | length 9.8
  Top Layer w0.254: IC1.22@95.956,38.625 96.975,38.625 101.649,33.951 R13.2
NetIC1_23: IC1.23 R12.2 | length 8.6
  Top Layer w0.254: IC1.23@95.956,39.275 96.003,39.322 96.783,39.322 98.748,41.286 98.748,42.51 101.349,45.111 R12.2
NetLED1_1: LED1.1 R13.1 | length 6.3
  Top Layer w0.254: LED1.1 101.976,35.56 103.351,34.185 R13.1
NetLED2_2: LED2.2 R11.1 | length 2.8
  Top Layer w0.254: R11.1 49.648,16.351 50.575,15.424 LED2.2
NetLS1_P: LS1.P R16.1 | length 10.1
  Top Layer w0.254: R16.1 96.803,64.935 97.288,64.45 LS1.P
NetR1_2: R1.2 U1.31 | length 30.4
  Top Layer w0.254: U1.31 62.65,42.65 62.1,43.2 62.1,46.1 v2(72.4,56.4) ; v2(79.5,56.4) R1.2
  Bottom Layer w0.254: v2(72.4,56.4) v2(79.5,56.4)
NetR2_2: R2.2 U1.30 | length 30.1
  Top Layer w0.254: U1.30 63.15,42.75 62.7,43.2 62.7,44.6 77.6,59.5 R2.2
NetR6_2: R6.2 S2.2 | length 5
  Top Layer w0.254: S2.2 58.028,22.441 58.524,22.937 58.524,24.922 R6.2
NetR7_2: R7.2 S3.2 | length 4.9
  Top Layer w0.254: S3.2 63.235,22.52 63.573,22.858 63.573,24.922 R7.2
NetR8_2: R8.2 S4.2 | length 5
  Top Layer w0.254: S4.2 68.569,22.412 69.124,22.967 69.124,24.922 R8.2
NetR9_2: R9.2 S5.2 | length 5.3
  Top Layer w0.254: S5.2 74.153,20.425 74.476,20.748 74.476,20.998 74.551,21.073 R9.2
NetR10_2: R10.2 S6.2 | length 5.2
  Top Layer w0.254: S6.2 79.237,22.525 79.765,23.053 79.765,25.122 R10.2
RESET: C12.1 R5.2 S1.2 U1.29 | length 65.9
  Top Layer w0.254: R5.2 61.451,65.1 S1.2 64.25,62.55 61.7,60 v1(61.7,52.3) ; v1(63.5,44.4) 63.5,44.306 63.65,44.156 U1.29 ; v1(86.974,30.4) 88.975,30.4 C12.1
  Bottom Layer w0.254: v1(61.7,52.3) 63.5,50.5 v1(63.5,44.4) 83.8,44.4 84.5,43.7 84.5,33.1 86.908,30.692 86.908,30.466 v1(86.974,30.4)
RX: IC1.1 R2.1 | length 18.5
  Top Layer w0.254: R2.1 85.94,59.311 86.451,59.311 88.644,57.118 IC1.1@88.644,42.525
SCL: R3.1 U1.28 U2.3 | length 76.1
  Top Layer w0.254: U1.28 64.15,44.45 73.6,53.9 R3.1 83.848,53.659 82.489,52.3 v2(82.4,52.3)
  Bottom Layer w0.254: U2.3 45.07,69.2 53.6,69.2 70.5,52.3 v2(82.4,52.3)
SDA: R4.1 U1.27 U2.4 | length 72.4
  Top Layer w0.254: U1.27 64.65,42.65 72.7,50.7 R4.1 83.9,50.652 v2(83.9,48)
  Bottom Layer w0.254: U2.4 49.328,66.6 67.928,48 v2(83.9,48)
TX: IC1.5 R1.1 | length 18.6
  Top Layer w0.254: R1.1 86.051,56.2 86.351,56.2 86.9,55.651 86.9,40.3 87.275,39.925 IC1.5@88.644,39.925
VIN: C11.2 J2.2 R14.1 U3.3 | length 26.6
  Top Layer w0.254: J2.2@31.2,15.1 31.2,15.474 36.342,20.616 37.23,20.616 U3.3@37.33,20.716 ; U3.3@37.336,20.4 43.1,20.4 43.7,19.8 R14.1 44.081,14.681 44.3,14.681 44.319,14.7 45.9,14.7 47.572,13.028 C11.2
VUSB: C7.1 C8.2 D2.A F1.2 | length 16.3
  Top Layer w0.254: C8.2 83.2,18.7 84.1,19.6 85.5,19.6 ; D2.A 85.445,19.655 85.5,19.6 ; F1.2 91.398,17.997 91.084,18.311 91.084,18.36 90.77,18.674 88.715,18.674 C7.1 87.359,19.6 85.5,19.6
XTAL1: C1.1 U1.7 Y1.2 | length 38.2
  Top Layer w0.254: Y1.2 31.6,36.8 32.473,35.927 33.673,35.927 35.403,34.197 C1.1@35.568,34.197 ; v1(35.4,37.5) 35.4,37.406 35.568,37.238 C1.1@35.568,34.197 ; C1.1 35.568,34.032 C1.1@35.568,34.197 ; v1(59.1,36.9) 59.1,36.994 59.3,37.194 59.3,37.5 60.35,38.55 U1.7
  Bottom Layer w0.254: v1(35.4,37.5) 58.557,37.5 59.1,36.957 v1(59.1,36.9)
XTAL2: C2.2 U1.8 Y1.1 | length 37.5
  Top Layer w0.254: Y1.1 32.05,29.5 C2.2 36.1,29.497 v1(36.1,27.6) ; v1(60.3,37) 60.3,37.5 60.85,38.05 U1.8
  Bottom Layer w0.254: v1(36.1,27.6) 52.5,27.6 60.3,35.4 v1(60.3,37)
pads on no net: IC1.3 IC1.6 IC1.8 IC1.9 IC1.10 IC1.11 IC1.12 IC1.13 IC1.14 IC1.19 IC1.24 IC1.27 IC1.28 J1.2 J1.6 J1.7 J1.8 J1.9 J1.10 J1.11 J2. U1.1 U1.2 U1.15 U1.16 U1.17 U1.22 U1.23 U1.24 U1.25 U1.26 U1.32 U2.S1 U2.S2 U2.S3 U2.S4

## Polygon pours and split planes (outlines as drawn)
GND on Top Layer "NONET_L-01_P-001" (solid, pour order 0): 26.5,69.5 26.6,69.4 106.2,69.4 106.2,9.9 106.1,9.8 106,9.9 26.4,9.9 26.4,69.2 26.5,69.3

## Keep-outs
Keep-Out Layer:
  lines w0.254: 26.3,9.6 26.3,69.6 106.3,69.6 106.4,69.5 106.4,9.6 106.2,9.6 26.3,9.6

## Text inside footprints (layer, text, board x,y; h text height)
J2: Mechanical 13 "PTH D1.8 +/- 0.05" at 36.7,30.115 h0.5 r180; Mechanical 13 "NPTH D1.8 +/- 0.05" at 36.7,31.385 h0.5 r180
LED1: Top Overlay "*" at 100.947,36.865 h1.27; Mechanical 13 "*" at 101.786,36.865 h1.27
LED2: Top Overlay "*" at 51.235,12.947 h1.27 r90; Mechanical 13 "*" at 51.235,13.786 h1.27 r90
U1: Mechanical 13 "*" at 61.639,41.165 h1.27